# Altium PCB PC110-itx.PcbDoc (part 2 of 16)
Units mm, origin at the board's own origin, x right, y up, seen from the top; angles counter-clockwise.
Board outline 170 x 170 mm, 16 copper layers (FC1, FC2, FC3, FC4, IP1, IC1, IC2, IP2, IP3, IC3, IC4, IP4, BC4, BC3, BC2, BC1), stack 3.903 mm thick; 935 components, 1357 nets, 4698 pads, 3240 vias.
Unrouted connection lines stored in the file: 552.
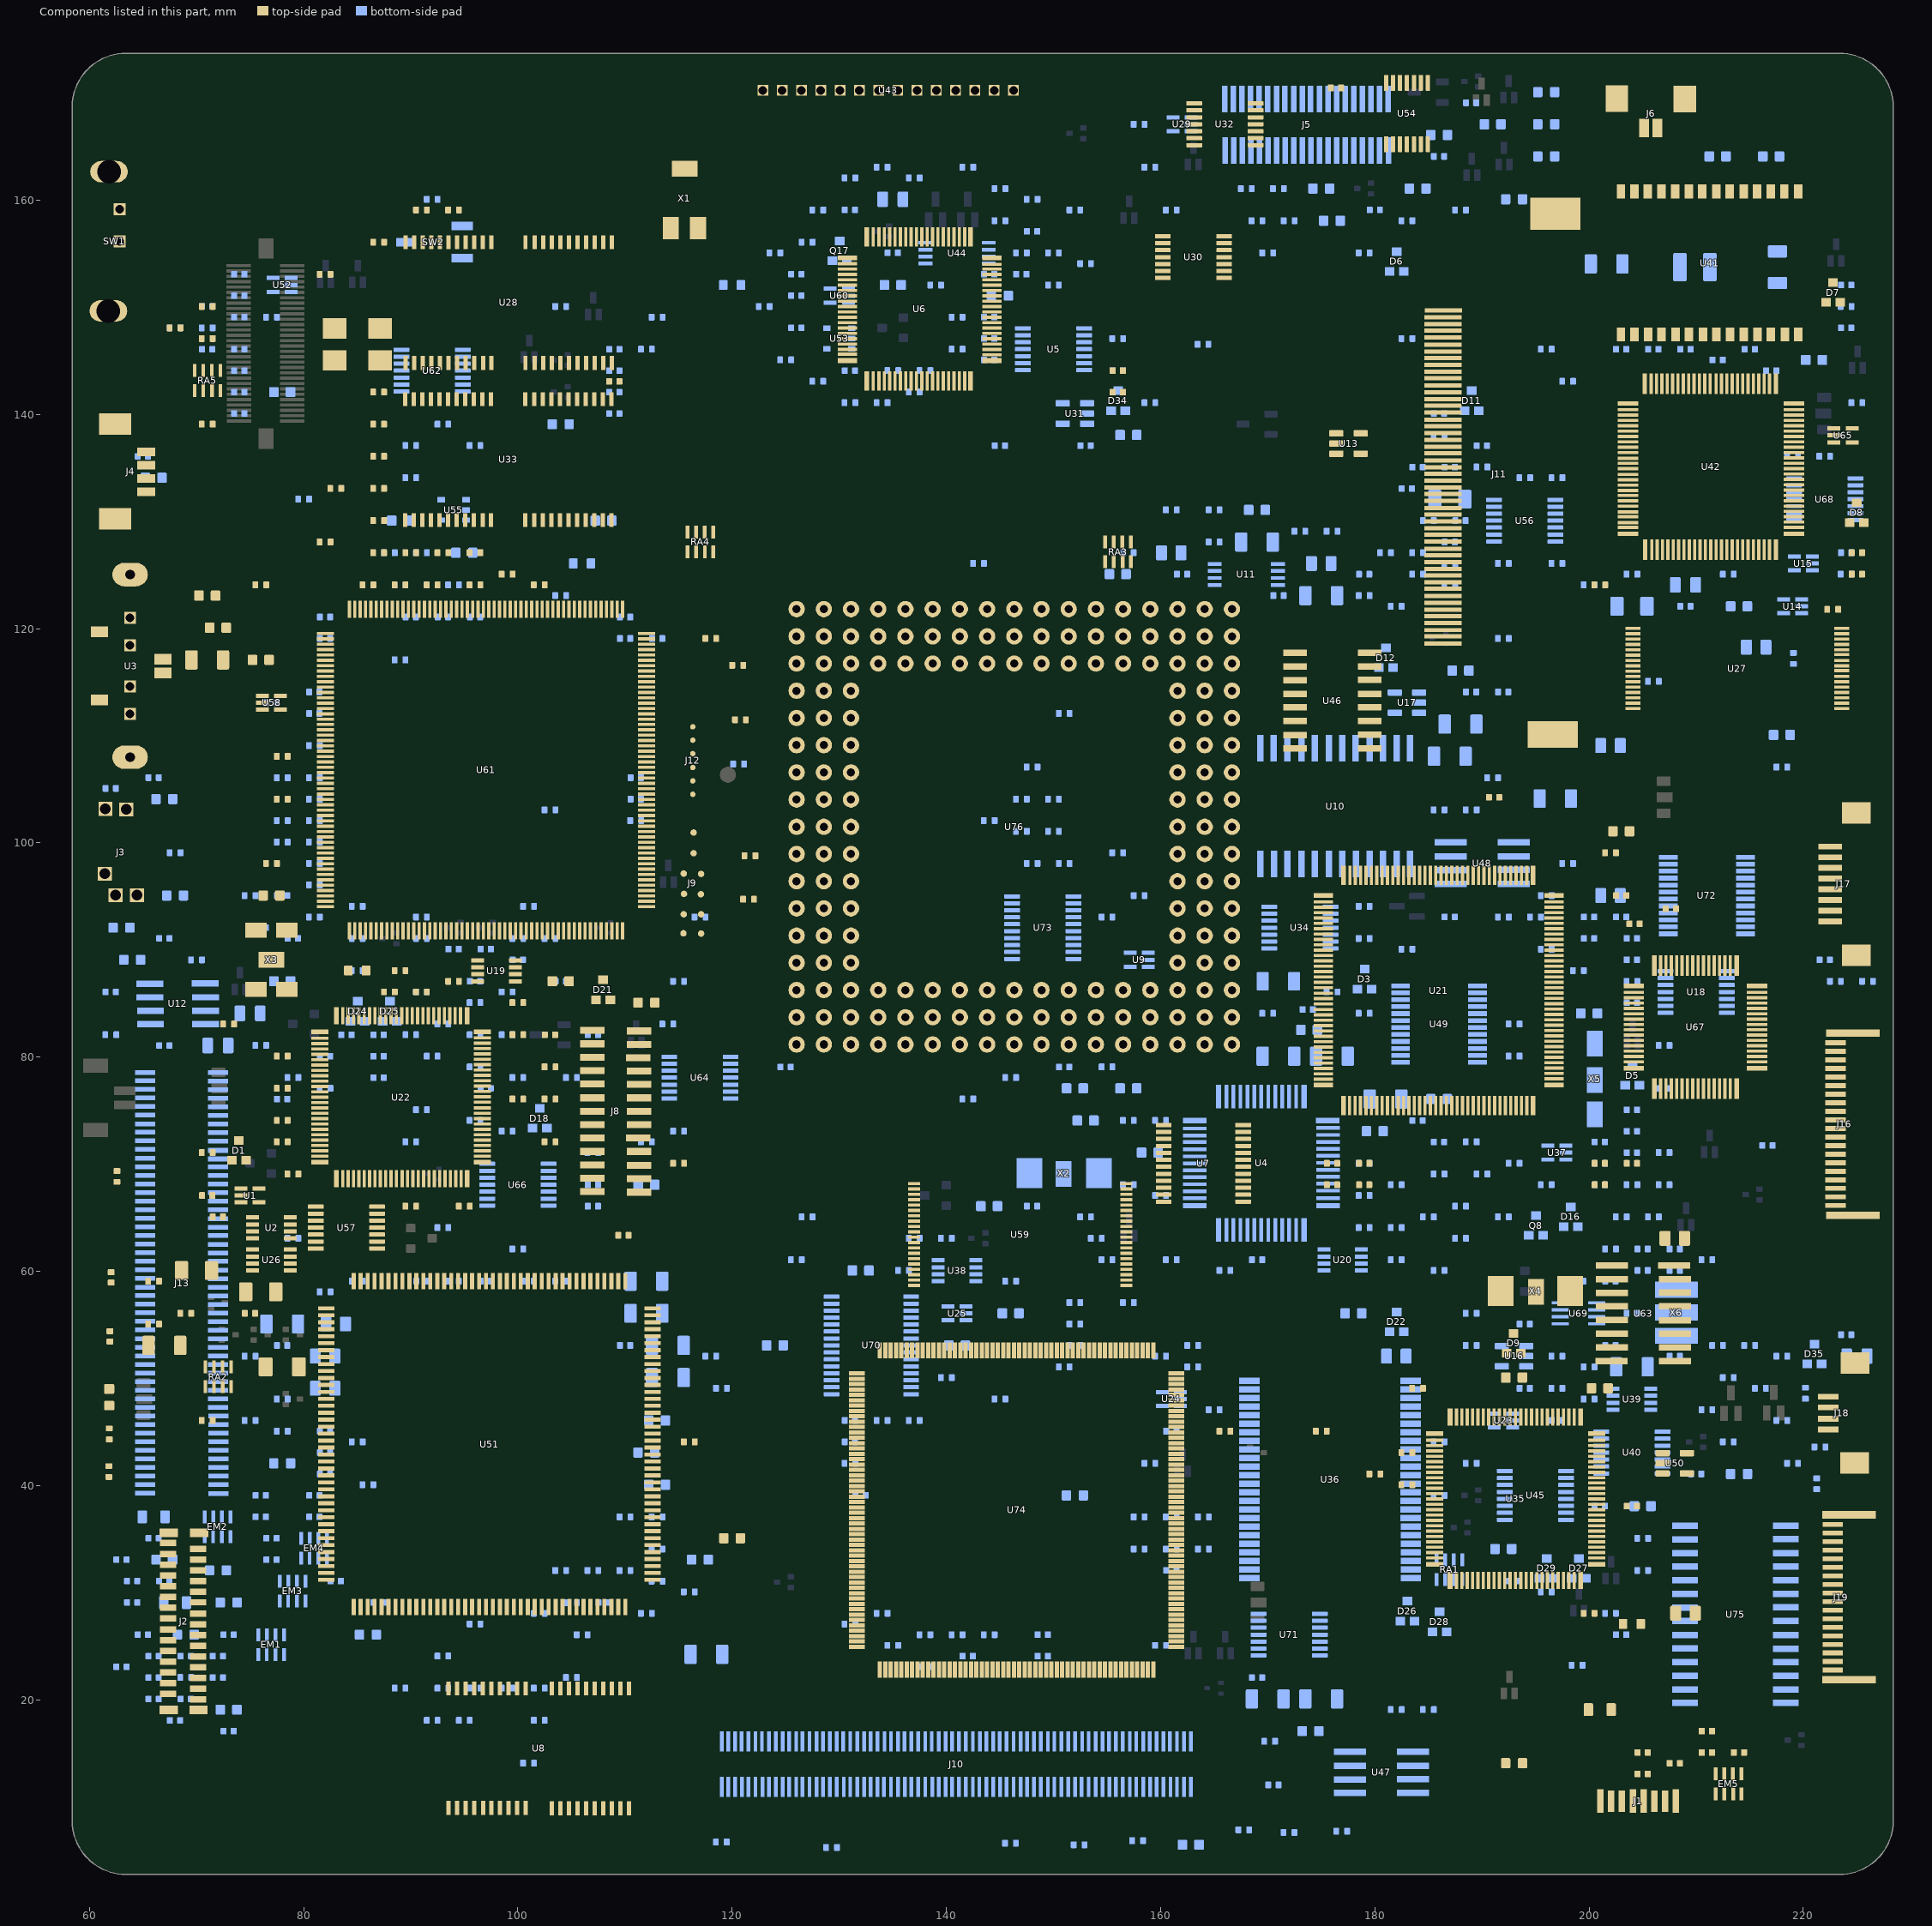
[diagram p16: the components of this part, seen from the top]

## Components (designator, comment, footprint, x,y, rotation, side; value= is the part's Value field where it differs from the comment) (continued)
R217 "Comment" R_0402_1005Metric#1 76,81.09 r0 bottom value=470k
R218 "Comment" R_0402_1005Metric#1 176.911,7.747 r0 bottom value=470k
R219 "Comment" R_0402_1005Metric#1 193,80.09 r0 bottom value=100k
R220 "Comment" R_0402_1005Metric#1 143,126.09 r0 bottom value=10k
R221 "Comment" R_0402_1005Metric#1 142,76.09 r0 bottom value=0
R222 "Comment" R_0402_1005Metric#1 152.398,6.477 r0 bottom value=6.8k
R223 "Comment" R_0402_1005Metric#1 176,86.09 r0 bottom value=100k
R224 "Comment" R_0402_1005Metric#1 179,70.09 r0 bottom value=470k
R225 "Comment" R_0402_1005Metric#1 118.997,6.731 r0 bottom value=6.8k
R226 "Comment" R_1206_3216Metric 171,87.09 r0 bottom value=120
R227 "Comment" R_0402_1005Metric#1 171.984,7.627 r0 bottom value=10k
R228 "Comment" R_0402_1005Metric#2 183,40.09 r0 top value=470k
R229 "Comment" R_0402_1005Metric#1 197,49.09 r0 bottom value=470k
R230 "Comment" R_0805_2012Metric#2 209,28.09 r0 top value=0
R231 "Comment" R_0603_1608Metric#2 204,27.09 r0 top value=0
R232 "Comment" R_0402_1005Metric#1 183,158.09 r0 bottom value=10k
R233 "Comment" R_0402_1005Metric#1 89,21.09 r0 bottom value=470k
R234 "Comment" R_0402_1005Metric#1 69,22.09 r0 bottom value=100k
R235 "Comment" R_0402_1005Metric#1 169,158.09 r0 bottom value=470k
R236 "Comment" R_0402_1005Metric#1 104,32.09 r0 bottom value=470
R237 "Comment" R_0402_1005Metric#1 161,159.09 r0 bottom value=10k
R238 "Comment" R_0603_1608Metric#2 85,88.09 r0 top value=56
R239 "Comment" R_0603_1608Metric#1 120,152.09 r0 bottom value=56
R240 "Comment" R_0402_1005Metric#1 113,149.09 r0 bottom value=47k
R241 "Comment" R_1206_3216Metric_Pad1.30x1.75mm_HandSolder 78,51.09 r0 top value=8.2
R242 "Comment" R_0402_1005Metric#2 166,45.09 r0 top value=7.5k
R243 "Comment" R_0402_1005Metric#1 191,106.09 r0 bottom value=470k
R244 "Comment" R_0402_1005Metric#1 189,103.09 r0 bottom value=470k
R245 "Comment" R_0402_1005Metric#1 186,103.09 r0 bottom value=470k
R246 "Comment" R_0402_1005Metric#1 103,91.09 r0 bottom value=47k
R247 "Comment" R_0402_1005Metric#1 120.609,107.362 r0 bottom value=470k
R248 "Comment" R_0402_1005Metric#1 91,93.09 r0 bottom value=470k
R249 "Comment" R_0402_1005Metric#1 100,91.09 r0 bottom value=47k
R250 "Comment" R_0805_2012Metric#1 175,126.09 r0 bottom value=0
R251 "Comment" R_0402_1005Metric#1 111,102.09 r0 bottom value=33
R252 "Comment" R_0402_1005Metric#2 120.777,111.506 r0 top value=33
R253 "Comment" R_0402_1005Metric#2 120.523,116.586 r0 top value=DNP
R254 "Comment" R_0402_1005Metric#1 170,84.09 r0 bottom value=47k
R255 "Comment" R_0402_1005Metric#1 100,62.09 r0 bottom value=33
R256 "Comment" R_0805_2012Metric#1 161,127.09 r0 bottom value=100
R257 "Comment" R_0402_1005Metric#1 127,65.09 r0 bottom value=33
R258 "Comment" R_0402_1005Metric#1 179,84.09 r0 bottom value=10k
R259 "Comment" R_0402_1005Metric#1 95,18.09 r0 bottom value=470k
R260 "Comment" R_0402_1005Metric#1 213,44.09 r0 bottom value=133k
R261 "Comment" R_0402_1005Metric#2 102,124.09 r0 top value=33
R262 "Comment" R_0402_1005Metric#1 145,48.09 r0 bottom value=470k
R263 "Comment" R_0402_1005Metric#1 85,59.09 r0 bottom value=4.7k
R264 "Comment" R_0805_2012Metric#1 83,55.09 r0 bottom value=150
R265 "Comment" R_0402_1005Metric#1 96,27.09 r0 bottom value=4.7k
R266 "Comment" R_0402_1005Metric#1 202,62.09 r0 bottom value=50k
R267 "Comment" R_0805_2012Metric#1 82,49.09 r0 bottom value=150
R268 "Comment" R_0402_1005Metric#1 161,131.09 r0 bottom value=100k
R269 "Comment" R_0402_1005Metric#1 96,21.09 r0 bottom value=470k
R270 "Comment" R_0402_1005Metric#1 102,21.09 r0 bottom value=4.7k
R271 "Comment" R_0402_1005Metric#1 219,42.09 r0 bottom value=DNP
R272 "Comment" R_0402_1005Metric#2 99,125.09 r0 top value=33
R273 "Comment" R_0805_2012Metric#1 82,52.09 r0 bottom value=150
R274 "Comment" R_0402_1005Metric#2 93,127.09 r0 top value=33
R275 "Comment" R_0402_1005Metric#1 211,61.09 r0 bottom value=4.7k
R276 "Comment" R_0402_1005Metric#1 186,60.09 r0 bottom value=33k
R277 "Comment" R_0402_1005Metric#1 82,77.09 r0 bottom value=200k
R278 "Comment" R_0402_1005Metric#1 134,141.09 r0 bottom value=470k
R279 "Comment" R_0402_1005Metric#1 99,21.09 r0 bottom value=4.7k
R280 "Comment" R_0402_1005Metric#1 79,78.09 r0 bottom value=47k
R281 "Comment" R_0402_1005Metric#1 96,137.09 r0 bottom value=10k
R282 "Comment" R_0402_1005Metric#1 171,161.09 r0 bottom value=470k
R283 "Comment" R_0402_1005Metric#1 128,143.09 r0 bottom value=4.7k
R284 "Comment" R_0805_2012Metric#2 208,63.09 r0 top value=10
R285 "Comment" R_0402_1005Metric#1 135,144.09 r0 bottom value=0
R286 "Comment" R_0402_1005Metric#1 188,159.09 r0 bottom value=22k
R287 "Comment" R_0402_1005Metric#1 77,149.09 r0 bottom value=470k
R288 "Comment" R_0402_1005Metric#1 131,141.09 r0 bottom value=47k
R289 "Comment" R_0402_1005Metric#2 175,45.09 r0 top value=10k
R290 "Comment" R_0402_1005Metric#1 192,126.09 r0 bottom value=DNP
R291 "Comment" R_0402_1005Metric#2 116,44.09 r0 top value=220
R292 "Comment" R_0805_2012Metric#1 202,95.09 r0 bottom value=DNP
R293 "Comment" R_0402_1005Metric#2 61.85,44.83 r90 top value=22k
R294 "Comment" R_0402_1005Metric#2 202,99.09 r0 top value=1.2k
R295 "Comment" R_0402_1005Metric#1 185,130.09 r0 bottom value=0
R296 "Comment" R_0402_1005Metric#1 197,134.09 r0 bottom value=DNP
R297 "Comment" R_0402_1005Metric#2 61.82,41.32 r90 top value=220
R298 "Comment" R_0402_1005Metric#1 197,126.09 r0 bottom value=DNP
R299 "Comment" R_0402_1005Metric#1 187,126.09 r0 bottom value=0
R300 "Comment" R_0805_2012Metric#1 215.6,118.28 r0 bottom value=0
R301 "Comment" R_0402_1005Metric#1 194,134.09 r0 bottom value=DNP
R302 "Comment" R_0402_1005Metric#2 79,69.09 r0 top value=470k
R303 "Comment" R_0402_1005Metric#2 88,86.09 r0 top value=470k
R304 "Comment" R_0402_1005Metric#1 196,30.09 r0 bottom value=4.7k
R305 "Comment" R_0402_1005Metric#2 89,88.09 r0 top value=470k
R306 "Comment" R_0402_1005Metric#2 90,66.09 r0 top value=470k
R307 "Comment" R_0402_1005Metric#2 78,72.09 r0 top value=470k
R308 "Comment" R_0402_1005Metric#1 123,150.09 r0 bottom value=10
R309 "Comment" R_0402_1005Metric#2 91,86.09 r0 top value=470k
R310 "Comment" R_0402_1005Metric#1 196,95.09 r0 bottom value=100k
R311 "Comment" R_0402_1005Metric#2 66,55.09 r0 top value=470k
R312 "Comment" R_0402_1005Metric#1 144,26.09 r0 bottom value=47k
R313 "Comment" R_0805_2012Metric#1 182,52.09 r0 bottom value=300
R314 "Comment" R_0402_1005Metric#1 189,72.09 r0 bottom value=470k
R315 "Comment" R_0402_1005Metric#1 90,82.09 r0 bottom value=470k
R316 "Comment" R_0402_1005Metric#1 81,109.09 r0 bottom value=1k
R317 "Comment" R_0402_1005Metric#1 90,72.09 r0 bottom value=33
R318 "Comment" R_0402_1005Metric#2 95,66.09 r0 top value=33
R319 "Comment" R_0402_1005Metric#1 78,106.09 r0 bottom value=1k
R320 "Comment" R_0402_1005Metric#1 104,123.09 r0 bottom value=10k
R321 "Comment" R_0402_1005Metric#1 112,146.09 r0 bottom value=100k
R322 "Comment" R_0402_1005Metric#2 121.664,98.806 r0 top value=33
R323 "Comment" R_0402_1005Metric#2 78,108.09 r0 top value=1k
R324 "Comment" R_0402_1005Metric#1 93,64.09 r0 bottom value=33
R325 "Comment" R_0402_1005Metric#1 137,63.09 r0 bottom value=10k
R326 "Comment" R_0402_1005Metric#2 78,104.09 r0 top value=33
R327 "Comment" R_0402_1005Metric#1 157,74.09 r0 bottom value=470k
R328 "Comment" R_0402_1005Metric#1 150,101.09 r0 bottom value=4.7k
R329 "Comment" R_0402_1005Metric#1 94,124.09 r0 bottom value=33
R330 "Comment" R_0402_1005Metric#1 148,98.09 r0 bottom value=4.7k
R331 "Comment" R_0402_1005Metric#1 148,107.09 r0 bottom value=4.7k
R332 "Comment" R_0402_1005Metric#1 85,88.09 r0 bottom value=33
R333 "Comment" R_0402_1005Metric#1 88,127.09 r0 bottom value=33
R334 "Comment" R_0402_1005Metric#2 87,127.09 r0 top value=33
R335 "Comment" R_0402_1005Metric#2 87,142.09 r0 top value=33
R336 "Comment" R_0402_1005Metric#1 147,104.09 r0 bottom value=4.7k
R337 "Comment" R_0402_1005Metric#2 89,124.09 r0 top value=33
R338 "Comment" R_0402_1005Metric#2 87,136.09 r0 top value=33
R339 "Comment" R_0402_1005Metric#1 151,98.09 r0 bottom value=4.7k
R340 "Comment" R_0402_1005Metric#1 101,94.09 r0 bottom value=33
R341 "Comment" R_0402_1005Metric#1 89,117.09 r0 bottom value=33
R342 "Comment" R_0402_1005Metric#1 90,134.09 r0 bottom value=33
R343 "Comment" R_0402_1005Metric#1 91,127.09 r0 bottom value=33
R344 "Comment" R_0402_1005Metric#1 196,68.09 r0 bottom value=DNP
R345 "Comment" R_0402_1005Metric#1 93,139.09 r0 bottom value=33
R346 "Comment" R_0402_1005Metric#1 90,137.09 r0 bottom value=33
R347 "Comment" R_0402_1005Metric#2 86,124.09 r0 top value=33
R348 "Comment" R_0402_1005Metric#1 118,52.09 r0 bottom value=33
R349 "Comment" R_0402_1005Metric#1 183,90.09 r0 bottom value=100k
R350 "Comment" R_0402_1005Metric#1 103,103.09 r0 bottom value=33
R351 "Comment" R_0402_1005Metric#1 150,104.09 r0 bottom value=4.7k
R352 "Comment" R_0402_1005Metric#2 87,133.09 r0 top value=33
R353 "Comment" R_0402_1005Metric#1 206,115.09 r0 bottom value=56
R354 "Comment" R_0402_1005Metric#1 147,101.09 r0 bottom value=4.7k
R355 "Comment" R_0402_1005Metric#1 144,102.09 r0 bottom value=4.7k
R356 "Comment" R_0402_1005Metric#1 141,146.09 r0 bottom value=47k
R357 "Comment" R_0402_1005Metric#1 192,119.09 r0 bottom value=33
R358 "Comment" R_0402_1005Metric#1 105,78.09 r0 bottom value=47
R359 "Comment" R_0402_1005Metric#1 114,83.09 r0 bottom value=33
R360 "Comment" R_0402_1005Metric#1 184,127.09 r0 bottom value=470k
R361 "Comment" R_0402_1005Metric#1 184,125.09 r0 bottom value=470k
R362 "Comment" R_0402_1005Metric#1 224,150.09 r0 bottom value=2k
R363 "Comment" R_0402_1005Metric#1 140,50.09 r0 bottom value=100k
R364 "Comment" R_0402_1005Metric#1 199,88.09 r0 bottom value=DNP
R365 "Comment" R_0402_1005Metric#1 204,125.09 r0 bottom value=10k
R366 "Comment" R_0402_1005Metric#1 222,136.09 r0 bottom value=0
R367 "Comment" R_0402_1005Metric#1 219,136.09 r0 bottom value=0
R368 "Comment" R_0402_1005Metric#1 225,141.09 r0 bottom value=1.5k
R369 "Comment" R_0402_1005Metric#1 187,124.09 r0 bottom value=22k
R370 "Comment" R_0402_1005Metric#1 155,79.09 r0 bottom value=0
R371 "Comment" R_0402_1005Metric#1 213,125.09 r0 bottom value=2k
R372 "Comment" R_0402_1005Metric#1 192,93.09 r0 bottom value=100k
R373 "Comment" R_0402_1005Metric#1 81,104.09 r0 bottom value=4.7k
R374 "Comment" R_0402_1005Metric#1 81,100.09 r0 bottom value=4.7k
R375 "Comment" R_0402_1005Metric#1 81,106.09 r0 bottom value=4.7k
R376 "Comment" R_0402_1005Metric#1 78,102.09 r0 bottom value=4.7k
R377 "Comment" R_0402_1005Metric#1 81,96.09 r0 bottom value=4.7k
R378 "Comment" R_0402_1005Metric#1 78,100.09 r0 bottom value=4.7k
R379 "Comment" R_0402_1005Metric#1 161,34.09 r0 bottom value=470k
R380 "Comment" R_0402_1005Metric#1 81,98.09 r0 bottom value=4.7k
R381 "Comment" R_0402_1005Metric#1 81,102.09 r0 bottom value=4.7k
R382 "Comment" R_0402_1005Metric#1 115,73.09 r0 bottom value=50k
R383 "Comment" R_0402_1005Metric#1 112,72.09 r0 bottom value=33k
R384 "Comment" R_0402_1005Metric#1 152,53.09 r0 bottom value=10k
R385 "Comment" R_0402_1005Metric#1 137,162.09 r0 bottom value=47k
R386 "Comment" R_0402_1005Metric#1 196,146.09 r0 bottom value=1k
R387 "Comment" R_0402_1005Metric#1 152,57.09 r0 bottom value=DNP
R388 "Comment" R_0402_1005Metric#1 151,112.09 r0 bottom value=3K
R389 "Comment" R_0402_1005Metric#1 151,51.09 r0 bottom value=10k
R390 "Comment" R_0402_1005Metric#1 137,142.09 r0 bottom value=100k
R391 "Comment" R_0402_1005Metric#1 163,51.09 r0 bottom value=10k
R392 "Comment" R_0402_1005Metric#1 189,56.09 r0 bottom value=22k
R393 "Comment" R_0402_1005Metric#1 104,59.09 r0 bottom value=47k
R394 "Comment" R_0402_1005Metric#1 163,53.09 r0 bottom value=DNP
R395 "Comment" R_0402_1005Metric#2 118,119.09 r0 top value=10k
R396 "Comment" R_0402_1005Metric#1 160,52.09 r0 bottom value=10k
R397 "Comment" R_0402_1005Metric#1 170,155.09 r0 bottom value=47k
R398 "Comment" R_0402_1005Metric#1 119,49.09 r0 bottom value=22k
R399 "Comment" R_0402_1005Metric#1 160,25.09 r0 bottom value=22k
R400 "Comment" R_0402_1005Metric#2 91,159.09 r0 top value=DNP
R401 "Comment" R_0402_1005Metric#2 87,156.09 r0 top value=100k
R402 "Comment" R_0402_1005Metric#1 68,148.09 r0 bottom value=DNP
R403 "Comment" R_0402_1005Metric#1 92,160.09 r0 bottom value=DNP
R404 "Comment" R_0402_1005Metric#1 71,148.09 r0 bottom value=100k
R405 "Comment" R_0402_1005Metric#1 89,124.09 r0 bottom value=100k
R406 "Comment" R_0402_1005Metric#2 68,148.09 r0 top value=100k
R407 "Comment" R_0402_1005Metric#1 155,61.09 r0 bottom value=100k
R408 "Comment" R_0402_1005Metric#1 221.55,43.62 r0 bottom value=47k
R409 "Comment" R_0402_1005Metric#1 124,155.09 r0 bottom value=2.2k
R410 "Comment" R_0402_1005Metric#1 126,61.09 r0 bottom value=20k
R411 "Comment" R_0402_1005Metric#1 221.25,40.18 r90 bottom value=47k
R412 "Comment" R_0402_1005Metric#1 183,147.09 r0 bottom value=7.5k
R413 "Comment" R_0402_1005Metric#1 154,63.09 r0 bottom value=100k
RA1 "Comment" R-array#1 187,32.09 r0 bottom value=47k
RA2 "Comment" R-array#2 72,50.09 r0 top value=10k
RA3 "Comment" R-array#2 156,127.09 r0 top value=22k
RA4 "Comment" R-array#2 117.012,128.032 r0 top value=10k
RA5 "Comment" R-array#2 71,143.09 r0 top value=470k
SW1 "Comment" Switch 61.877,155.912 r0 top value=Switch
SW2 "Comment" LidSwitch 92,156.09 r0 bottom value=LidSwitch
U1 "Comment" SOT-353#1 75,67.09 r0 top value=EA
U2 "Comment" sso-8#1 77,64.09 r0 top value=7W32
U3 "Comment" IRDA 65.35,116.505 r90 top value="HSDL-1000 X03"
U4 "Comment" QFN-52 169,70.09 r0 bottom value=ES488F
U5 "Comment" TSSOP-14_4.4x5mm_P0.65mm#1 150,146.09 r0 bottom value=74HC14
U6 "Comment" QFN-80 137.71,149.825 r0 top value=M38223E4HP
U7 "Comment" TSSOP-24_6.1x7.8mm_P0.65mm 164,70.09 r0 top value=HD151015
U8 "Comment" GRAMchip 101.981,15.621 r0 top value=51W4260ATT7
U9 "Comment" SOT-353#2 158,89.09 r0 bottom value=E4
U10 "Comment" SOP-24 176,104.09 r0 bottom value=YM3812
U11 "Comment" soic-8-small 168,125.09 r0 bottom value=NJM2904M
U12 "Comment" SOIC-8-narrow 68,85.09 r0 bottom value=LM4861
U13 "Comment" SOT-23-5#1 177.546,137.287 r0 top value=8C01
U14 "Comment" SOT-353#2 219,122.09 r0 bottom value=EA
U15 "Comment" SOT-353#2 220,126.09 r0 bottom value=EA
U16 "Comment" SOT-23-5#2 193,52.09 r0 bottom value=8C01
U17 "Comment" SOT-23-5#2 183,113.09 r0 bottom value=3E00
U18 "Comment" TSSOP-14_4.4x5mm_P0.65mm#1 210,86.09 r0 bottom value=VT74
U19 "Comment" sso-8#1 98,88.09 r0 top value=7W126
U20 "Comment" sso-8#2 177,61.09 r0 bottom value=7W14
U21 "Comment" Bowman 186.182,86.741 r0 top value=Bowman
U22 "Comment" FDC 88.65,76.56 r90 top value=FDC37C665IR
U23 "Comment" SOT-353#2 192,46.09 r0 bottom value=EA
U24 "Comment" SOT-353#2 161,48.09 r0 bottom value=E4
U25 "Comment" SOT-353#2 141,56.09 r0 bottom value=E4
U26 "Comment" sso-8#1 77,61.09 r0 top value=7W126
U27 "Comment" Flash-32 214.08,115.89 r0 top value=AT29LV512-12TU
U28 "Comment" RAMchip 99.533,150.607 r0 top value=M5M4V16160BTP
U29 "Comment" SOT-353#2 162,167.09 r0 bottom value=E2
U30 "Comment" TSSOP-14_4.4x5mm_P0.65mm#2 163.068,154.686 r0 top value=74LVT74
U31 "Comment" SOT-23-5#2 152,140.09 r0 bottom value=3F01
U32 "Comment" TSSOP-14_4.4x5mm_P0.65mm#2 166,167.09 r0 top value=V74
U33 "Comment" RAMchip 99.513,135.948 r0 top value=M5M4V16160BTP
U34 "Comment" TSSOP-14_4.4x5mm_P0.65mm#1 173,92.09 r0 bottom value=74LV126
U35 "Comment" Pluto 193.12,39.25 r0 top value=Pluto
U36 "Comment" SOP48 175.59,40.94 r0 bottom value=MSM538032E
U37 "Comment" SOT-353#2 197,71.09 r0 bottom value=E8
U38 "Comment" sso-8#2 141,60.09 r0 bottom value=7W14
U39 "Comment" sso-8#2 204,48.09 r0 bottom value=7W00
U40 "Comment" TSSOP-14_4.4x5mm_P0.65mm#1 204,43.09 r0 bottom value=SN74LS74a
U41 "Comment" SanDisk 211.875,154.45 r0 top value=SDLB-4
U42 "Comment" QFN-100 211.852,134.95 r0 top value=SC414281PU4
U43 "Comment" LCD 134.77,170.26 r0 top value="Front LCD"
U44 "Comment" soic-8-small 141,155.09 r0 bottom value=NJM2904M
U45 "Comment" TSSOP-16_4.4x5mm_P0.65mm 195,39.09 r0 bottom value=SN74LS123A
U46 "Comment" SOP-16 176.022,113.284 r180 top value=Y3014
U47 "Comment" SOIC-8 180.594,13.208 r0 bottom value=3414A
U48 "Comment" SOIC-8 190,98.09 r0 bottom value=DS1669
U49 "Comment" SSOP-24_5.3x8.2mm_P0.65mm 186,83.09 r0 bottom value=HD151015
U50 "Comment" SOT-23-5#1 208,42.09 r0 top value=3T01
U51 "Comment" EIAJ160 97.35,43.88 r270 top value=~
U52 "Comment" SOT-353#2 78,152.09 r0 bottom value=EA
U53 "Comment" TSOP-5_1.65x3.05mm_P0.95mm 130,147.09 r0 bottom value=3F01
U54 "Comment" TSSOP-14_4.4x5mm_P0.65mm#2 183,168.09 r270 top value=SN74HC74
U55 "Comment" TSOP-5_1.65x3.05mm_P0.95mm 94,131.09 r0 bottom value=3T01
U56 "Comment" TSSOP-14_4.4x5mm_P0.65mm#1 194,130.09 r0 bottom value=SN74LV32
U57 "Comment" TSSOP-14_4.4x5mm_P0.65mm#2 84,64.09 r0 top value=SN74LVT125
U58 "Comment" SOT-353#1 77,113.09 r0 top value=EA
U59 "Comment" Flash-40 147,64.09 r0 top value=28F002BX
U60 "Comment" SOT-353#2 130,151.09 r0 bottom value=E3
U61 "Comment" QFP208 97.028,106.807 r180 top value=~
U62 "Comment" TSSOP-14_4.4x5mm_P0.65mm#1 92,144.09 r0 bottom value=SN74LVT125
U63 "Comment" SOIC-16W 205,56.09 r0 top value=AV9154A-27
U64 "Comment" TSSOP-14_4.4x5mm_P0.65mm#1 117,78.09 r0 bottom value=SN74LV126
U65 "Comment" SOT-353#1 223.7,138.05 r0 top value=E4
U66 "Comment" TSSOP-14_4.4x5mm_P0.65mm#1 100,68.09 r0 bottom value=SN74LV02
U67 "Comment" QFN64 210.185,83.058 r180 top value=M38813M4
U68 "Comment" TSSOP-14_4.4x5mm_P0.65mm#1 222,132.09 r0 bottom value=SN74LV08
U69 "Comment" SSOP-8_2.95x2.8mm_P0.65mm 199,56.09 r0 bottom value=SN74LVC2G32
U70 "Comment" TSSOP-30_6.1x9.7mm_P0.65mm 133,53.09 r0 bottom value=TPS2201
U71 "Comment" TSSOP-14_4.4x5mm_P0.65mm#1 172,26.09 r0 bottom value=SN74LV32
U72 "Comment" SSOP-24_5.3x8.2mm_P0.65mm 211,95.09 r0 bottom value=HD151015
U73 "Comment" TSSOP-20_4.4x6.5mm_P0.65mm 149,92.09 r0 bottom value=SN74LVT244B
U74 "Comment" LQFP208 146.558,37.719 r270 top value=~
U75 "Comment" SSOP-28 214.205,27.56 r90 bottom value=D17137AGT
U76 "Comment" PGA168 123.482,124.367 r0 top value=~
X1 "Comment" XTAL-2 115.52,162.941 r0 top value=245759
X2 "Comment" XTAL-1 151,69.09 r0 bottom value=89G6821
X3 "Comment" XTAL-3 77,89.09 r0 top value=32768
X4 "Comment" XTAL-6 195,58.09 r0 top value=59G3482
X5 "Comment" XTAL-5 200.533,77.851 r0 bottom value=4.00
X6 "Comment" XTAL-4 208,56.09 r0 bottom value=8.00

## Footprints (in the part's own frame and the unit in brackets; to place one, negate y for a bottom-side part, rotate by r counter-clockwise, add the part's x,y. Pads: shape width x height; smd on the part's side, far side on the other; paste and mask are expansions set on the pad)
3D#1 [mm]
  rect 0.9x0.8 smd paste-0.9 mask+0: 1(0.625,-0.725) 2(-0.05,1.125) 3(-0.7,-0.725)
3D#2 [mm]
  rect 0.9x0.8 smd paste-0.9 mask+0: 1(-0.625,0.725) 2(0.05,-1.125) 3(0.7,0.725)
Audio-Jack [mm]
  rect 1.3x1.3 hole 1 paste-2539.97 mask+0: 1(3.95,2.95) 2(3.9,1) 3(-2.1,3) 4(-4.1,2) 5(-4.1,0)
  Edge.Cuts circle w0.254: c1.9,-2.05 r0.791
  Edge.Cuts circle w0.254: c-2.1,0.95 r0.791
  Edge.Cuts circle w0.254: c1.9,1.95 r0.791
  Edge.Cuts circle w0: c1.9,1.95 r0.791
Bowman [mm]
  rect 1.8x0.45 smd paste-1.8 mask+0: 1(-10.973,8.35) 36(-11,-9.35) 73(10.55,-9.35) 108(10.55,8.35)
  rect 1.8x0.3 smd paste-1.8 mask+0: 2(-10.973,7.75) 3(-10.973,7.25) 4(-10.973,6.757) 5(-10.973,6.25) 6(-10.973,5.75) 7(-10.973,5.25) 8(-10.973,4.75) 9(-10.973,4.25) 10(-10.973,3.75) 11(-10.973,3.252) 12(-10.973,2.75) 13(-10.973,2.25) 14(-10.973,1.75) 15(-10.973,1.25) 16(-10.973,0.75) 17(-10.973,0.25) 18(-10.973,-0.253) 19(-10.973,-0.761) 20(-10.973,-1.269) 21(-10.973,-1.777) 22(-10.973,-2.285) 23(-11,-2.793) 24(-11,-3.3) 25(-11,-3.8) 26(-11,-4.3) 27(-11,-4.8) 28(-11,-5.3) 29(-11,-5.8) 30(-11,-6.3) 31(-11,-6.8) 32(-11,-7.3) 33(-11,-7.8) 34(-11,-8.3) 35(-11,-8.8) 74(10.55,-8.75) 75(10.55,-8.25) 76(10.55,-7.75) 77(10.55,-7.25) 78(10.55,-6.75) 79(10.55,-6.25) 80(10.55,-5.75) 81(10.55,-5.25) 82(10.55,-4.75) 83(10.55,-4.25) 84(10.55,-3.75) 85(10.55,-3.25) 86(10.55,-2.75) 87(10.55,-2.25) 88(10.55,-1.75) 89(10.55,-1.25) 90(10.55,-0.75) 91(10.55,-0.25) 92(10.55,0.25) 93(10.55,0.75) 94(10.55,1.25) 95(10.55,1.75) 96(10.55,2.25) 97(10.55,2.75) 98(10.55,3.25) 99(10.55,3.75) 100(10.55,4.25) 101(10.55,4.75) 102(10.55,5.25) 103(10.55,5.75) 104(10.55,6.25) 105(10.55,6.75) 106(10.55,7.25) 107(10.55,7.75)
  rect 0.45x1.8 smd paste-1.8 mask+0: 37(-9.1,-11.25) 72(8.6,-11.25) 109(8.6,10.225) 144(-9.1,10.225)
  rect 0.3x1.8 smd paste-1.8 mask+0: 38(-8.534,-11.25) 39(-8.026,-11.25) 40(-7.518,-11.25) 41(-7.01,-11.25) 42(-6.502,-11.25) 43(-5.994,-11.25) 44(-5.5,-11.25) 45(-5,-11.25) 46(-4.5,-11.25) 47(-4,-11.25) 48(-3.5,-11.25) 49(-3,-11.25) 50(-2.5,-11.25) 51(-2,-11.25) 52(-1.5,-11.25) 53(-1,-11.25) 54(-0.5,-11.25) 55(0,-11.25) 56(0.5,-11.25) 57(1,-11.25) 58(1.5,-11.25) 59(2,-11.25) 60(2.5,-11.25) 61(3,-11.25) 62(3.5,-11.25) 63(4,-11.25) 64(4.5,-11.25) 65(5,-11.25) 66(5.5,-11.25) 67(6,-11.25) 68(6.5,-11.25) 69(7,-11.25) 70(7.5,-11.25) 71(8,-11.25) 110(8,10.225) 111(7.5,10.225) 112(7,10.225) 113(6.5,10.225) 114(6,10.225) 115(5.5,10.225) 116(5,10.225) 117(4.5,10.225) 118(4,10.225) 119(3.5,10.225) 120(3,10.225) 121(2.5,10.225) 122(2,10.225) 123(1.5,10.225) 124(1,10.225) 125(0.5,10.225) 126(0,10.225) 127(-0.5,10.225) 128(-1,10.225) 129(-1.5,10.225) 130(-2,10.225) 131(-2.5,10.225) 132(-3,10.225) 133(-3.5,10.225) 134(-4,10.225) 135(-4.5,10.225) 136(-5,10.225) 137(-5.5,10.225) 138(-6,10.225) 139(-6.5,10.225) 140(-7,10.225) 141(-7.5,10.225) 142(-8,10.225) 143(-8.5,10.225)
  silkscreen extent -9.22,7.78 -8.38,8.62
BridgeBatt [mm]
  rect 0.9x1.7 smd paste-1.7 mask+0: 1(0.65,-1.2) 2(-0.6,-1.2)
  rect 2.1x2.5 smd paste-2.5 mask+0: 3(3.2,1.5) 4(-3.15,1.55)
C_0402_1005Metric#1 [mm]
  rrect25% 0.56x0.62 smd paste-0.62 mask+0: 1(-0.48,0) 2(0.48,0)
  silkscreen extent -0.11,-0.36 0.11,0.36
C_0402_1005Metric#2 [mm]
  rrect25% 0.56x0.62 smd paste-0.62 mask+0: 1(0.48,0) 2(-0.48,0)
  silkscreen extent -0.11,-0.36 0.11,0.36
C_0603_1608Metric#1 [mm]
  rrect25% 0.9x0.95 smd paste-0.95 mask+0: 1(0.775,0) 2(-0.775,0)
  silkscreen extent -0.14,-0.51 0.14,0.51
C_0603_1608Metric#2 [mm]
  rrect25% 0.9x0.95 smd paste-0.95 mask+0: 1(-0.775,0) 2(0.775,0)
  silkscreen extent -0.14,-0.51 0.14,0.51
C_0805_2012Metric [mm]
  rrect25% 1x1.45 smd paste-1.45 mask+0: 1(0.95,0) 2(-0.95,0)
  silkscreen extent -0.26,-0.73 0.26,0.74
C_1206_3216Metric#1 [mm]
  rrect22% 1.15x1.8 smd paste-1.8 mask+0: 1(1.475,0) 2(-1.475,0)
  silkscreen extent -0.71,-0.91 0.71,0.91
C_1206_3216Metric#2 [mm]
  rrect22% 1.15x1.8 smd paste-1.8 mask+0: 1(-1.475,0) 2(1.475,0)
  silkscreen extent -0.71,-0.91 0.71,0.91
CF-card [mm]
  rect 0.4x3.5 smd paste-3.5 mask+0: 1(16.65,-5.2) 2(16,-5.2) 3(15.4,-5.2) 4(14.75,-5.2) 5(14.1,-5.2) 6(13.5,-5.2) 7(12.85,-5.2) 8(12.2,-5.2) 9(11.55,-5.2) 10(10.95,-5.2) 11(10.3,-5.2) 12(9.7,-5.2) 13(9.05,-5.2) 14(8.4,-5.2) 15(7.8,-5.2) 16(7.15,-5.2) 17(6.5,-5.2) 18(5.9,-5.2) 19(5.25,-5.2) 20(4.6,-5.2) 21(4,-5.2) 22(3.35,-5.2) 23(2.7,-5.2) 24(2.1,-5.2) 25(1.45,-5.2) 26(0.8,-5.2) 27(0.2,-5.2) 28(-0.45,-5.2) 29(-1.1,-5.2) 30(-1.7,-5.2) 31(-2.35,-5.2) 32(-3,-5.2) 33(-3.65,-5.2) 34(-4.25,-5.2) 35(-4.9,-5.2) 36(-5.55,-5.2) 37(-6.15,-5.2) 38(-6.8,-5.2) 39(-7.45,-5.2) 40(-8.1,-5.2) 41(-8.7,-5.2) 42(-9.35,-5.2) 43(-10,-5.2) 44(-10.6,-5.2) 45(-11.25,-5.2) 46(-11.9,-5.2) 47(-12.55,-5.2) 48(-13.15,-5.2) 49(-13.8,-5.2) 50(-14.45,-5.15)
  rect 3x4.7 smd paste-4.7 mask+0: 51(-23.45,5.3)
  rect 2.5x4.7 smd paste-4.7 mask+0: 52(25.15,5.05)
  silkscreen extent 17.49,-7.96 18.21,-7.24
connector-4 [mm]
  rect 0.8x1.7 smd paste-1.7 mask+0: 1(-1.9,-1.7) 2(-0.65,-1.7) 3(0.6,-1.7) 4(1.85,-1.7)
  rect 2x3 smd paste-3 mask+0: 5(-4.4,1.2) 6(4.45,1.2)
D_0603_1608Metric#1 [mm]
  rrect25% 0.875x0.95 smd paste-0.95 mask+0: 1(-0.788,0) 2(0.787,0)
  silkscreen extent -1.49,-0.73 0.8,0.74
D_0603_1608Metric#2 [mm]
  rrect25% 0.875x0.95 smd paste-0.95 mask+0: 1(0.788,0) 2(-0.787,0)
  silkscreen extent -0.8,-0.73 1.49,0.74
Debug-6 [mm]
  round 0.5 smd paste-0.5 mask+0: 1(-0.05,3.15) 2(-0.05,1.9) 3(-0.05,0.65) 4(-0.05,-0.65) 5(-0.05,-1.9) 6(-0.05,-3.15)
Debug-10 [mm]
  round 0.6 smd paste-0.6 mask+0: 1(0.075,4.825) 2(0.075,2.9) 3(0.775,0.975) 4(-0.85,1) 5(0.75,-0.925) 6(-0.825,-0.9) 7(0.775,-2.8) 8(-0.85,-2.8) 9(0.775,-4.6) 10(-0.875,-4.575)
Diode [mm]
  rect 2.2x1.9 smd paste-2.2 mask+0: 1(-2.1,-0.05) 2(2.15,-0.05)
  silkscreen extent -0.75,-0.85 -0.75,0.85
"Docking Port" [mm]
  rect 0.45x1.9 smd paste-1.9 mask+0: 1(19.2,-3.25) 2(18.35,-3.25) 3(17.55,-3.25) 4(16.75,-3.25) 5(15.95,-3.25) 6(15.15,-3.25) 7(14.35,-3.25) 8(13.55,-3.25) 9(12.75,-3.25) 10(11.95,-3.25) 11(11.15,-3.2) 12(10.35,-3.2) 13(9.55,-3.2) 14(8.75,-3.2) 15(7.95,-3.2) 16(7.15,-3.2) 17(6.35,-3.2) 18(5.55,-3.2) 19(4.75,-3.2) 20(3.95,-3.2) 21(3.15,-3.2) 22(2.35,-3.2) 23(1.55,-3.2) 24(0.75,-3.2) 25(-0.05,-3.2) 26(-0.85,-3.2) 27(-1.65,-3.2) 28(-2.5,-3.2) 29(-3.25,-3.2) 30(-4.05,-3.2) 31(-4.9,-3.2) 32(-5.65,-3.2) 33(-6.45,-3.2) 34(-7.3,-3.2) 35(-8.1,-3.2) 36(-8.9,-3.2) 37(-9.7,-3.2) 38(-10.5,-3.2) 39(-11.3,-3.2) 40(-12.05,-3.2) 41(-12.85,-3.2) 42(-13.7,-3.2) 43(-14.5,-3.2) 44(-15.3,-3.2) 45(-16.1,-3.2) 46(-16.9,-3.2) 47(-17.7,-3.2) 48(-18.5,-3.2) 49(-19.3,-3.2) 50(-20.1,-3.2) 51(-20.1,3.6) 52(-19.35,3.6) 53(-18.55,3.6) 54(-17.75,3.6) 55(-16.95,3.6) 56(-16.15,3.6) 57(-15.3,3.6) 58(-14.55,3.6) 59(-13.75,3.6) 60(-12.95,3.6) 61(-12.1,3.6) 62(-11.3,3.6) 63(-10.5,3.6) 64(-9.7,3.6) 65(-8.9,3.6) 66(-8.1,3.6) 67(-7.3,3.6) 68(-6.5,3.6) 69(-5.7,3.6) 70(-4.9,3.6) 71(-4.1,3.6) 72(-3.3,3.6) 73(-2.5,3.6) 74(-1.7,3.6) 75(-0.9,3.6) 76(-0.05,3.6) 77(0.7,3.6) 78(1.5,3.6) 79(2.3,3.6) 80(3.1,3.6) 81(3.9,3.6) 82(4.75,3.6) 83(5.55,3.6) 84(6.35,3.6) 85(7.15,3.6) 86(7.95,3.6) 87(8.75,3.6) 88(9.55,3.6) 89(10.35,3.6) 90(11.15,3.6) 91(11.95,3.6) 92(12.75,3.6) 93(13.55,3.6) 94(14.35,3.6) 95(15.15,3.6) 96(15.95,3.6) 97(16.75,3.6) 98(17.55,3.6) 99(18.35,3.6) 100(19.15,3.6)
EIAJ160 [mm]
  rect 1.53x0.38 smd paste-1.53 mask+0: 1(-15.22,12.675) 2(-15.22,12.025) 3(-15.22,11.375) 4(-15.22,10.725) 5(-15.22,10.075) 6(-15.22,9.425) 7(-15.22,8.775) 8(-15.22,8.125) 9(-15.22,7.475) 10(-15.22,6.825) 11(-15.22,6.175) 12(-15.22,5.525) 13(-15.22,4.875) 14(-15.22,4.225) 15(-15.22,3.575) 16(-15.22,2.925) 17(-15.22,2.275) 18(-15.22,1.625) 19(-15.22,0.975) 20(-15.22,0.325) 21(-15.22,-0.325) 22(-15.22,-0.975) 23(-15.22,-1.625) 24(-15.22,-2.275) 25(-15.22,-2.925) 26(-15.22,-3.575) 27(-15.22,-4.225) 28(-15.22,-4.875) 29(-15.22,-5.525) 30(-15.22,-6.175) 31(-15.22,-6.825) 32(-15.22,-7.475) 33(-15.22,-8.125) 34(-15.22,-8.775) 35(-15.22,-9.425) 36(-15.22,-10.075) 37(-15.22,-10.725) 38(-15.22,-11.375) 39(-15.22,-12.025) 40(-15.22,-12.675) 81(15.22,-12.675) 82(15.22,-12.025) 83(15.22,-11.375) 84(15.22,-10.725) 85(15.22,-10.075) 86(15.22,-9.425) 87(15.22,-8.775) 88(15.22,-8.125) 89(15.22,-7.475) 90(15.22,-6.825) 91(15.22,-6.175) 92(15.22,-5.525) 93(15.22,-4.875) 94(15.22,-4.225) 95(15.22,-3.575) 96(15.22,-2.925) 97(15.22,-2.275) 98(15.22,-1.625) 99(15.22,-0.975) 100(15.22,-0.325) 101(15.22,0.325) 102(15.22,0.975) 103(15.22,1.625) 104(15.22,2.275) 105(15.22,2.925) 106(15.22,3.575) 107(15.22,4.225) 108(15.22,4.875) 109(15.22,5.525) 110(15.22,6.175) 111(15.22,6.825) 112(15.22,7.475) 113(15.22,8.125) 114(15.22,8.775) 115(15.22,9.425) 116(15.22,10.075) 117(15.22,10.725) 118(15.22,11.375) 119(15.22,12.025) 120(15.22,12.675)
  rect 0.38x1.53 smd paste-1.53 mask+0: 41(-12.675,-15.22) 42(-12.025,-15.22) 43(-11.375,-15.22) 44(-10.725,-15.22) 45(-10.075,-15.22) 46(-9.425,-15.22) 47(-8.775,-15.22) 48(-8.125,-15.22) 49(-7.475,-15.22) 50(-6.825,-15.22) 51(-6.175,-15.22) 52(-5.525,-15.22) 53(-4.875,-15.22) 54(-4.225,-15.22) 55(-3.575,-15.22) 56(-2.925,-15.22) 57(-2.275,-15.22) 58(-1.625,-15.22) 59(-0.975,-15.22) 60(-0.325,-15.22) 61(0.325,-15.22) 62(0.975,-15.22) 63(1.625,-15.22) 64(2.275,-15.22) 65(2.925,-15.22) 66(3.575,-15.22) 67(4.225,-15.22) 68(4.875,-15.22) 69(5.525,-15.22) 70(6.175,-15.22) 71(6.825,-15.22) 72(7.475,-15.22) 73(8.125,-15.22) 74(8.775,-15.22) 75(9.425,-15.22) 76(10.075,-15.22) 77(10.725,-15.22) 78(11.375,-15.22) 79(12.025,-15.22) 80(12.675,-15.22) 121(12.675,15.22) 122(12.025,15.22) 123(11.375,15.22) 124(10.725,15.22) 125(10.075,15.22) 126(9.425,15.22) 127(8.775,15.22) 128(8.125,15.22) 129(7.475,15.22) 130(6.825,15.22) 131(6.175,15.22) 132(5.525,15.22) 133(4.875,15.22) 134(4.225,15.22) 135(3.575,15.22) 136(2.925,15.22) 137(2.275,15.22) 138(1.625,15.22) 139(0.975,15.22) 140(0.325,15.22) 141(-0.325,15.22) 142(-0.975,15.22) 143(-1.625,15.22) 144(-2.275,15.22) 145(-2.925,15.22) 146(-3.575,15.22) 147(-4.225,15.22) 148(-4.875,15.22) 149(-5.525,15.22) 150(-6.175,15.22) 151(-6.825,15.22) 152(-7.475,15.22) 153(-8.125,15.22) 154(-8.775,15.22) 155(-9.425,15.22) 156(-10.075,15.22) 157(-10.725,15.22) 158(-11.375,15.22) 159(-12.025,15.22) 160(-12.675,15.22)
  silkscreen extent -15.9,-14.12 14.12,14.12
FDC [mm]
  rect 0.45x1.6 smd paste-1.6 mask+0: 1(5.8,7.15) 25(-6.35,7.15) 51(-6.35,-8.05) 75(5.8,-8.05)
  rect 0.3x1.6 smd paste-1.6 mask+0: 2(5.2,7.15) 3(4.7,7.15) 4(4.2,7.15) 5(3.7,7.15) 6(3.2,7.15) 7(2.7,7.15) 8(2.2,7.15) 9(1.7,7.15) 10(1.2,7.15) 11(0.7,7.15) 12(0.2,7.15) 13(-0.3,7.15) 14(-0.8,7.15) 15(-1.3,7.15) 16(-1.8,7.15) 17(-2.3,7.15) 18(-2.8,7.15) 19(-3.3,7.15) 20(-3.8,7.15) 21(-4.3,7.15) 22(-4.8,7.15) 23(-5.3,7.15) 24(-5.8,7.15) 52(-5.8,-8.05) 53(-5.3,-8.05) 54(-4.8,-8.05) 55(-4.3,-8.05) 56(-3.8,-8.05) 57(-3.3,-8.05) 58(-2.8,-8.05) 59(-2.3,-8.05) 60(-1.8,-8.05) 61(-1.3,-8.05) 62(-0.75,-8.05) 63(-0.25,-8.05) 64(0.25,-8.05) 65(0.75,-8.05) 66(1.25,-8.05) 67(1.75,-8.05) 68(2.25,-8.05) 69(2.75,-8.05) 70(3.25,-8.05) 71(3.75,-8.05) 72(4.25,-8.05) 73(4.75,-8.05) 74(5.25,-8.05)
  rect 1.6x0.45 smd paste-1.6 mask+0: 26(-7.9,5.6) 50(-7.9,-6.6) 76(7.3,-6.6) 100(7.3,5.6)
  rect 1.6x0.3 smd paste-1.6 mask+0: 27(-7.9,5) 28(-7.9,4.5) 29(-7.9,4) 30(-7.9,3.5) 31(-7.9,3) 32(-7.9,2.5) 33(-7.9,2) 34(-7.9,1.5) 35(-7.9,1) 36(-7.9,0.5) 37(-7.9,0) 38(-7.9,-0.55) 39(-7.9,-1.05) 40(-7.9,-1.55) 41(-7.9,-2.05) 42(-7.9,-2.55) 43(-7.9,-3.05) 44(-7.9,-3.55) 45(-7.9,-4.05) 46(-7.9,-4.55) 47(-7.9,-5.05) 48(-7.9,-5.55) 49(-7.9,-6.05) 77(7.3,-6) 78(7.3,-5.5) 79(7.3,-5) 80(7.3,-4.5) 81(7.3,-4) 82(7.3,-3.5) 83(7.3,-3) 84(7.3,-2.5) 85(7.3,-2) 86(7.3,-1.5) 87(7.3,-1) 88(7.3,-0.5) 89(7.3,0) 90(7.3,0.5) 91(7.3,1) 92(7.3,1.5) 93(7.3,2) 94(7.3,2.5) 95(7.3,3) 96(7.3,3.5) 97(7.3,4) 98(7.3,4.5) 99(7.3,5)
  silkscreen extent 5.06,4.86 6.04,5.84
Flash-32 [mm]
  rect 1.4x0.3 smd paste-1.4 mask+0: 1(-10,4.15) 2(-10,3.65) 3(-10,3.15) 4(-10,2.65) 5(-10,2.15) 6(-10,1.65) 7(-10,1.15) 8(-10,0.65) 9(-10,0.15) 10(-10,-0.35) 11(-10,-0.85) 12(-10,-1.35) 13(-10,-1.85) 14(-10,-2.35) 15(-10,-2.85) 16(-10,-3.35) 17(9.5,-3.35) 18(9.5,-2.85) 19(9.5,-2.35) 20(9.5,-1.85) 21(9.5,-1.35) 22(9.5,-0.85) 23(9.5,-0.35) 24(9.5,0.2) 25(9.5,0.65) 26(9.5,1.15) 27(9.5,1.7) 28(9.5,2.15) 29(9.5,2.65) 30(9.5,3.15) 31(9.5,3.65) 32(9.5,4.15)
  silkscreen extent -8.84,3.36 -8.26,3.94
Flash-40 [mm]
  rect 1.1x0.3 smd paste-1.1 mask+0: 1(9.8,-5.4) 2(9.8,-4.9) 3(9.8,-4.4) 4(9.8,-3.9) 5(9.8,-3.4) 6(9.8,-2.9) 7(9.8,-2.4) 8(9.8,-1.9) 9(9.8,-1.4) 10(9.8,-0.9) 11(9.8,-0.4) 12(9.8,0.1) 13(9.8,0.6) 14(9.8,1.1) 15(9.8,1.6) 16(9.8,2.1) 17(9.8,2.6) 18(9.8,3.1) 19(9.8,3.6) 20(9.8,4.1) 21(-10,4.1) 22(-10,3.6) 23(-10,3.1) 24(-10,2.6) 25(-10,2.1) 26(-10,1.6) 27(-10,1.1) 28(-10,0.6) 29(-10,0.1) 30(-10,-0.4) 31(-10,-0.9) 32(-10,-1.4) 33(-10,-1.9) 34(-10,-2.4) 35(-10,-2.9) 36(-10,-3.4) 37(-10,-3.9) 38(-10,-4.4) 39(-10,-4.9) 40(-10,-5.4)
  silkscreen extent 8.22,-5.53 8.78,-4.97
Flat-4 [mm]
  rect 0.55x1.9 smd paste-1.9 mask+0: 1(-1.55,2.75) 2(-0.55,2.75) 3(0.5,2.75) 4(1.5,2.75)
  rect 2x2.7 smd paste-2.7 mask+0: 5(4.65,0.25) 6(-4.7,0.3)
Flat-8 [mm]
  rect 0.55x2.2 smd paste-2.2 mask+0: 1(-3.6,1.7) 2(-2.6,1.7) 3(-1.6,1.7) 4(-0.6,1.7) 5(0.4,1.7) 6(1.4,1.7) 7(2.4,1.7) 8(3.4,1.7)
  rect 2x2.7 smd paste-2.7 mask+0: 9(6.55,-0.75) 10(-6.75,-0.75)
Flat-18 [mm]
  rect 0.45x1.9 smd paste-1.9 mask+0: 1(-7,1.6) 2(-6.2,1.6) 3(-5.4,1.6) 4(-4.6,1.6) 5(-3.8,1.6) 6(-3,1.6) 7(-2.2,1.6) 8(-1.4,1.6) 9(-0.6,1.6) 10(0.2,1.6) 11(1,1.6) 12(1.8,1.6) 13(2.6,1.6) 14(3.4,1.6) 15(4.2,1.6) 16(5,1.6) 17(5.8,1.6) 18(6.6,1.6)
  rect 0.7x5 smd paste-5 mask+0: 19(7.5,0.1) 20(-7.9,0.1)
Flat-20 [mm]
  rect 0.45x1.9 smd paste-1.9 mask+0: 1(-7.6,1.3) 2(-6.8,1.3) 3(-6,1.3) 4(-5.2,1.3) 5(-4.4,1.3) 6(-3.6,1.3) 7(-2.8,1.3) 8(-2,1.3) 9(-1.2,1.3) 10(-0.4,1.3) 11(0.4,1.3) 12(1.2,1.3) 13(2,1.3) 14(2.8,1.3) 15(3.6,1.3) 16(4.4,1.3) 17(5.2,1.3) 18(6,1.3) 19(6.8,1.3) 20(7.6,1.3)
  rect 0.7x5 smd paste-5 mask+0: 21(8.5,-0.3) 22(-8.5,-0.3)
Fuse_1206_3216Metric#1 [mm]
  rrect20% 1.25x1.75 smd paste-1.75 mask+0: 1(1.4,0) 2(-1.4,0)
  silkscreen extent -0.6,-0.91 0.6,0.91
Fuse_1206_3216Metric#2 [mm]
  rrect20% 1.25x1.75 smd paste-1.75 mask+0: 1(-1.4,0) 2(1.4,0)
  silkscreen extent -0.6,-0.91 0.6,0.91
GRAMchip [mm]
  rect 0.4x1.3 smd paste-1.3 mask+0: 1(8.4,5.45) 2(7.6,5.45) 3(6.8,5.45) 4(6,5.45) 5(5.2,5.45) 6(4.4,5.45) 7(3.6,5.45) 8(2.8,5.45) 9(2,5.45) 10(1.2,5.45) 11(-1.25,5.45) 12(-2.05,5.45) 13(-2.85,5.45) 14(-3.65,5.45) 15(-4.45,5.45) 16(-5.25,5.45) 17(-6.05,5.45) 18(-6.85,5.45) 19(-7.65,5.45) 20(-8.45,5.45) 21(-8.45,-5.7) 22(-7.65,-5.7) 23(-6.85,-5.7) 24(-6.05,-5.7) 25(-5.2,-5.7) 26(-4.45,-5.7) 27(-3.65,-5.7) 28(-2.85,-5.7) 29(-2.05,-5.7) 30(-1.25,-5.7) 31(1.2,-5.75) 32(2,-5.75) 33(2.8,-5.75) 34(3.6,-5.75) 35(4.4,-5.75) 36(5.2,-5.75) 37(6,-5.75) 38(6.8,-5.75) 39(7.6,-5.75) 40(8.4,-5.75)
  silkscreen extent 7.84,3.54 8.56,4.26
IRDA [mm]
  rect 1x1.6 smd paste-1.6 mask+0: 1(0.65,-1.5) 2(-0.65,-1.5) 3(3.2,4.4) 4(-3.15,4.4)
  rect 1.1x1.1 hole 0.8 paste-2539.97 mask+0: 5(4.5,1.55) 6(1.95,1.55) 7(-1.9,1.55) 8(-4.45,1.55)
  rrect100% 2.2x3.3 hole 0.9 slot 2 at 90 deg paste-2539.97 mask+0: 9(8.55,1.55) 10(-8.5,1.55)
  Edge.Cuts circle w0.254: c7.25,-1.011 r0.461
  Edge.Cuts circle w0.254: c-7.25,-1 r0.461
L_0603_1608Metric#1 [mm]
  rrect25% 0.875x0.95 smd paste-0.95 mask+0: 1(-0.787,0) 2(0.788,0)
  silkscreen extent -0.16,-0.51 0.16,0.51
L_0603_1608Metric#2 [mm]
  rrect25% 0.875x0.95 smd paste-0.95 mask+0: 1(0.787,0) 2(-0.787,0)
  silkscreen extent -0.16,-0.51 0.16,0.51
L_0805_2012Metric#1 [mm]
  rrect25% 0.875x1.2 smd paste-1.2 mask+0: 1(1.062,0) 2(-1.063,0)
  silkscreen extent -0.4,-0.56 0.4,0.56
L_0805_2012Metric#2 [mm]
  rrect25% 0.875x1.2 smd paste-1.2 mask+0: 1(-1.062,0) 2(1.062,0)
  silkscreen extent -0.4,-0.56 0.4,0.56
L_1210_3225Metric [mm]
  rrect20% 1.25x2.65 smd paste-2.65 mask+0: 1(1.4,0) 2(-1.4,0)
  silkscreen extent -2.4,-1.7 2.4,1.7
LCD [mm]
  rect 1x1 hole 0.8 paste-2539.97 mask+0: 1(-11.9,0) 2(-10.1,0) 3(-8.3,0) 4(-6.5,0) 5(-4.7,0) 6(-2.9,0) 7(-1.1,0) 8(0.7,0) 9(2.5,0) 10(4.3,0) 11(6.1,0) 12(7.9,0) 13(9.7,0) 14(11.5,0)
LCD_connector [mm]
  rect 0.6x1.5 smd paste-1.5 mask+0: 1(-7.4,-1.25) 2(-6.9,1.55) 3(-6.4,-1.25) 4(-5.9,1.55) 5(-5.4,-1.25) 6(-4.9,1.55) 7(-4.4,-1.25) 8(-3.9,1.55) 9(-3.4,-1.25) 10(-2.9,1.55) 11(-2.4,-1.25) 12(-1.9,1.55) 13(-1.4,-1.25) 14(-0.9,1.55) 15(-0.4,-1.25) 16(0.15,1.55) 17(0.6,-1.25) 18(1.15,1.55) 19(1.65,-1.25) 20(2.15,1.55) 21(2.65,-1.25) 22(3.15,1.55) 23(3.65,-1.25) 24(4.15,1.55) 25(4.65,-1.25) 26(5.15,1.55) 27(5.65,-1.25) 28(6.15,1.55) 29(6.65,-1.25) 30(7.2,1.55)
  rect 0.8x1.7 smd paste-1.7 mask+0: 31(8.15,-1.35) 32(8.15,1.5) 33(-8.4,1.5) 34(-8.4,-1.3)
  silkscreen extent -8.23,-2.93 -7.67,-2.37
LidSwitch [mm]
  rect 1.6x0.8 smd paste-1.6 mask+0: 1(-2.575,0)
  rect 2x0.8 smd paste-2 mask+0: 2(2.8,-1.525) 3(2.8,1.475)
LQFP208 [mm]
  rect 1.5x0.4 smd paste-1.5 mask+0: 1(-14.9,12.75) 2(-14.9,12.25) 3(-14.9,11.75) 4(-14.9,11.25) 5(-14.9,10.75) 6(-14.9,10.25) 7(-14.9,9.75) 8(-14.9,9.25) 9(-14.9,8.75) 10(-14.9,8.25) 11(-14.9,7.75) 12(-14.9,7.25) 13(-14.9,6.75) 14(-14.9,6.25) 15(-14.9,5.75) 16(-14.9,5.25) 17(-14.9,4.75) 18(-14.9,4.25) 19(-14.9,3.75) 20(-14.9,3.25) 21(-14.9,2.75) 22(-14.9,2.25) 23(-14.9,1.75) 24(-14.9,1.25) 25(-14.9,0.75) 26(-14.9,0.25) 27(-14.9,-0.25) 28(-14.9,-0.75) 29(-14.9,-1.25) 30(-14.9,-1.75) 31(-14.9,-2.25) 32(-14.9,-2.75) 33(-14.9,-3.25) 34(-14.9,-3.75) 35(-14.9,-4.25) 36(-14.9,-4.75) 37(-14.9,-5.25) 38(-14.9,-5.75) 39(-14.9,-6.25) 40(-14.9,-6.75) 41(-14.9,-7.25) 42(-14.9,-7.75) 43(-14.9,-8.25) 44(-14.9,-8.75) 45(-14.9,-9.25) 46(-14.9,-9.75) 47(-14.9,-10.25) 48(-14.9,-10.75) 49(-14.9,-11.25) 50(-14.9,-11.75) 51(-14.9,-12.25) 52(-14.9,-12.75) 105(14.9,-12.75) 106(14.9,-12.25) 107(14.9,-11.75) 108(14.9,-11.25) 109(14.9,-10.75) 110(14.9,-10.25) 111(14.9,-9.75) 112(14.9,-9.25) 113(14.9,-8.75) 114(14.9,-8.25) 115(14.9,-7.75) 116(14.9,-7.25) 117(14.9,-6.75) 118(14.9,-6.25) 119(14.9,-5.75) 120(14.9,-5.25) 121(14.9,-4.75) 122(14.9,-4.25) 123(14.9,-3.75) 124(14.9,-3.25) 125(14.9,-2.75) 126(14.9,-2.25) 127(14.9,-1.75) 128(14.9,-1.25) 129(14.9,-0.75) 130(14.9,-0.25) 131(14.9,0.25) 132(14.9,0.75) 133(14.9,1.25) 134(14.9,1.75) 135(14.9,2.25) 136(14.9,2.75) 137(14.9,3.25) 138(14.9,3.75) 139(14.9,4.25) 140(14.9,4.75) 141(14.9,5.25) 142(14.9,5.75) 143(14.9,6.25) 144(14.9,6.75) 145(14.9,7.25) 146(14.9,7.75) 147(14.9,8.25) 148(14.9,8.75) 149(14.9,9.25) 150(14.9,9.75) 151(14.9,10.25) 152(14.9,10.75) 153(14.9,11.25) 154(14.9,11.75) 155(14.9,12.25) 156(14.9,12.75)
  rect 0.4x1.5 smd paste-1.5 mask+0: 53(-12.75,-14.9) 54(-12.25,-14.9) 55(-11.75,-14.9) 56(-11.25,-14.9) 57(-10.75,-14.9) 58(-10.25,-14.9) 59(-9.75,-14.9) 60(-9.25,-14.9) 61(-8.75,-14.9) 62(-8.25,-14.9) 63(-7.75,-14.9) 64(-7.25,-14.9) 65(-6.75,-14.9) 66(-6.25,-14.9) 67(-5.75,-14.9) 68(-5.25,-14.9) 69(-4.75,-14.9) 70(-4.25,-14.9) 71(-3.75,-14.9) 72(-3.25,-14.9) 73(-2.75,-14.9) 74(-2.25,-14.9) 75(-1.75,-14.9) 76(-1.25,-14.9) 77(-0.75,-14.9) 78(-0.25,-14.9) 79(0.25,-14.9) 80(0.75,-14.9) 81(1.25,-14.9) 82(1.75,-14.9) 83(2.25,-14.9) 84(2.75,-14.9) 85(3.25,-14.9) 86(3.75,-14.9) 87(4.25,-14.9) 88(4.75,-14.9) 89(5.25,-14.9) 90(5.75,-14.9) 91(6.25,-14.9) 92(6.75,-14.9) 93(7.25,-14.9) 94(7.75,-14.9) 95(8.25,-14.9) 96(8.75,-14.9) 97(9.25,-14.9) 98(9.75,-14.9) 99(10.25,-14.9) 100(10.75,-14.9) 101(11.25,-14.9) 102(11.75,-14.9) 103(12.25,-14.9) 104(12.75,-14.9) 157(12.75,14.9) 158(12.25,14.9) 159(11.75,14.9) 160(11.25,14.9) 161(10.75,14.9) 162(10.25,14.9) 163(9.75,14.9) 164(9.25,14.9) 165(8.75,14.9) 166(8.25,14.9) 167(7.75,14.9) 168(7.25,14.9) 169(6.75,14.9) 170(6.25,14.9) 171(5.75,14.9) 172(5.25,14.9) 173(4.75,14.9) 174(4.25,14.9) 175(3.75,14.9) 176(3.25,14.9) 177(2.75,14.9) 178(2.25,14.9) 179(1.75,14.9) 180(1.25,14.9) 181(0.75,14.9) 182(0.25,14.9) 183(-0.25,14.9) 184(-0.75,14.9) 185(-1.25,14.9) 186(-1.75,14.9) 187(-2.25,14.9) 188(-2.75,14.9) 189(-3.25,14.9) 190(-3.75,14.9) 191(-4.25,14.9) 192(-4.75,14.9) 193(-5.25,14.9) 194(-5.75,14.9) 195(-6.25,14.9) 196(-6.75,14.9) 197(-7.25,14.9) 198(-7.75,14.9) 199(-8.25,14.9) 200(-8.75,14.9) 201(-9.25,14.9) 202(-9.75,14.9) 203(-10.25,14.9) 204(-10.75,14.9) 205(-11.25,14.9) 206(-11.75,14.9) 207(-12.25,14.9) 208(-12.75,14.9)
  silkscreen extent -15.65,-14.12 14.12,14.12
Modem-Connector [mm]
  rect 0.65x2.286 smd paste-2.286 mask+0: 1(-7.55,2.15) 2(-6.3,2.15) 3(-5.05,2.15) 4(-3.8,2.15) 5(-2.55,2.15) 6(-1.3,2.15) 7(-0.05,2.15) 8(1.2,2.15) 9(2.5,2.15) 10(3.75,2.15) 11(5,2.15) 12(6.25,2.15) 13(7.5,2.15) 14(-7.6,-2.2) 15(-6.35,-2.2) 16(-5.1,-2.2) 17(-3.8,-2.2) 18(-2.55,-2.15) 19(-1.3,-2.2) 20(-0.05,-2.2) 21(1.2,-2.2) 22(2.45,-2.2) 23(3.7,-2.2) 24(4.95,-2.15) 25(6.2,-2.2) 26(7.45,-2.2)
  silkscreen extent -9.23,3.12 -8.67,3.68
PCMCIA [mm]
  rect 0.35x1.9 smd paste-1.9 mask+0: 1(-21.95,2) 2(-21.3,2) 3(-20.65,2) 4(-20,2) 5(-19.4,2) 6(-18.75,2) 7(-18.1,2) 8(-17.5,2) 9(-16.85,2) 10(-16.25,2) 11(-15.6,2) 12(-14.95,2) 13(-14.3,2) 14(-13.7,2) 15(-13.05,2) 16(-12.4,2) 17(-11.8,2) 18(-11.15,2) 19(-10.5,2) 20(-9.85,2) 21(-9.2,2) 22(-8.6,2) 23(-7.95,2) 24(-7.3,2) 25(-6.65,2) 26(-6.05,2) 27(-5.4,2) 28(-4.75,2) 29(-4.1,2) 30(-3.5,2) 31(-2.85,2) 32(-2.25,2) 33(-1.6,2) 34(-0.95,2) 35(-0.3,2) 36(0.35,2) 37(0.95,2) 38(1.6,2) 39(2.25,2) 40(2.85,2) 41(3.5,2) 42(4.15,2) 43(4.8,2) 44(5.4,2) 45(6.05,2) 46(6.65,2) 47(7.3,2) 48(7.95,2) 49(8.55,2) 50(9.2,2) 51(9.85,2) 52(10.5,2) 53(11.1,2) 54(11.75,2) 55(12.4,2) 56(13,2) 57(13.65,2) 58(14.3,2) 59(14.9,2) 60(15.55,2) 61(16.15,2) 62(16.8,2) 63(17.45,2) 64(18.1,2) 65(18.7,2) 66(19.35,2) 67(20,2) 68(20.6,2) 69(21.25,2) 70(21.85,2) 71(-21.95,-2.25) 72(-21.3,-2.25) 73(-20.65,-2.25) 74(-20.05,-2.25) 75(-19.4,-2.25) 76(-18.75,-2.25) 77(-18.15,-2.25) 78(-17.5,-2.25) 79(-16.85,-2.25) 80(-16.25,-2.25) 81(-15.6,-2.25) 82(-14.95,-2.25) 83(-14.35,-2.25) 84(-13.7,-2.25) 85(-13.05,-2.25) 86(-12.4,-2.25) 87(-11.75,-2.25) 88(-11.15,-2.25) 89(-10.5,-2.25) 90(-9.85,-2.25) 91(-9.2,-2.25) 92(-8.6,-2.25) 93(-7.95,-2.25) 94(-7.3,-2.25) 95(-6.65,-2.25) 96(-6.05,-2.25) 97(-5.4,-2.25) 98(-4.75,-2.25) 99(-4.15,-2.25) 100(-3.5,-2.25) 101(-2.85,-2.25) 102(-2.2,-2.25) 103(-1.6,-2.25) 104(-0.95,-2.25) 105(-0.3,-2.25) 106(0.35,-2.25) 107(0.95,-2.25) 108(1.6,-2.25) 109(2.2,-2.25) 110(2.85,-2.25) 111(3.5,-2.25) 112(4.15,-2.25) 113(4.75,-2.25) 114(5.4,-2.25) 115(6.05,-2.25) 116(6.7,-2.25) 117(7.3,-2.25) 118(7.95,-2.25) 119(8.55,-2.25) 120(9.2,-2.25) 121(9.85,-2.25) 122(10.45,-2.25) 123(11.1,-2.25) 124(11.75,-2.25) 125(12.4,-2.25) 126(13,-2.25) 127(13.65,-2.25) 128(14.3,-2.25) 129(14.9,-2.25) 130(15.55,-2.25) 131(16.15,-2.25) 132(16.8,-2.25) 133(17.45,-2.25) 134(18.05,-2.25) 135(18.7,-2.25) 136(19.35,-2.25) 137(19.95,-2.25) 138(20.6,-2.25) 139(21.25,-2.25) 140(21.85,-2.25)
  silkscreen extent -24.03,1.87 -22.87,3.03
PGA168 [mil]
  round 60 hole 30 paste-99999 mask+0: A1(1700,-100) A2(1700,-200) A3(1700,-300) A4(1700,-400) A5(1700,-500) A6(1700,-600) A7(1700,-700) A8(1700,-800) A9(1700,-900) A10(1700,-1000) A11(1700,-1100) A12(1700,-1200) A13(1700,-1300) A14(1700,-1400) A15(1700,-1500) A16(1700,-1600) A17(1700,-1700) B1(1600,-100) B2(1600,-200) B3(1600,-300) B4(1600,-400) B5(1600,-500) B6(1600,-600) B7(1600,-700) B8(1600,-800) B9(1600,-900) B10(1600,-1000) B11(1600,-1100) B12(1600,-1200) B13(1600,-1300) B14(1600,-1400) B15(1600,-1500) B16(1600,-1600) B17(1600,-1700) C1(1500,-100) C2(1500,-200) C3(1500,-300) C4(1500,-400) C5(1500,-500) C6(1500,-600) C7(1500,-700) C8(1500,-800) C9(1500,-900) C10(1500,-1000) C11(1500,-1100) C12(1500,-1200) C13(1500,-1300) C14(1500,-1400) C15(1500,-1500) C16(1500,-1600) C17(1500,-1700) D1(1400,-100) D2(1400,-200) D3(1400,-300) D15(1400,-1500) D16(1400,-1600) D17(1400,-1700) E1(1300,-100) E2(1300,-200) E3(1300,-300) E15(1300,-1500) E16(1300,-1600) E17(1300,-1700) F1(1200,-100) F2(1200,-200) F3(1200,-300) F15(1200,-1500) F16(1200,-1600) F17(1200,-1700) G1(1100,-100) G2(1100,-200) G3(1100,-300) G15(1100,-1500) G16(1100,-1600) G17(1100,-1700) H1(1000,-100) H2(1000,-200) H3(1000,-300) H15(1000,-1500) H16(1000,-1600) H17(1000,-1700) J1(900,-100) J2(900,-200) J3(900,-300) J15(900,-1500) J16(900,-1600) J17(900,-1700) K1(800,-100) K2(800,-200) K3(800,-300) K15(800,-1500) K16(800,-1600) K17(800,-1700) L1(700,-100) L2(700,-200) L3(700,-300) L15(700,-1500) L16(700,-1600) L17(700,-1700) M1(600,-100) M2(600,-200) M3(600,-300) M15(600,-1500) M16(600,-1600) M17(600,-1700) N1(500,-100) N2(500,-200) N3(500,-300) N15(500,-1500) N16(500,-1600) N17(500,-1700) P1(400,-100) P2(400,-200) P3(400,-300) P15(400,-1500) P16(400,-1600) P17(400,-1700) Q1(300,-100) Q2(300,-200) Q3(300,-300) Q4(300,-400) Q5(300,-500) Q6(300,-600) Q7(300,-700) Q8(300,-800) Q9(300,-900) Q10(300,-1000) Q11(300,-1100) Q12(300,-1200) Q13(300,-1300) Q14(300,-1400) Q15(300,-1500) Q16(300,-1600) Q17(300,-1700) R1(200,-100) R2(200,-200) R3(200,-300) R4(200,-400) R5(200,-500) R6(200,-600) R7(200,-700) R8(200,-800) R9(200,-900) R10(200,-1000) R11(200,-1100) R12(200,-1200) R13(200,-1300) R14(200,-1400) R15(200,-1500) R16(200,-1600) R17(200,-1700) S1(100,-100) S2(100,-200) S3(100,-300) S4(100,-400) S5(100,-500) S6(100,-600) S7(100,-700) S8(100,-800) S9(100,-900) S10(100,-1000) S11(100,-1100) S12(100,-1200) S13(100,-1300) S14(100,-1400) S15(100,-1500) S16(100,-1600) S17(100,-1700)
  silkscreen extent 16,-1783 1786,-17
Pluto [mm]
  rect 0.45x1.6 smd paste-1.6 mask+0: 1(6.1,7.15) 25(-6.1,7.15) 51(-6.1,-8.1) 75(6.1,-8.1)
  rect 0.3x1.6 smd paste-1.6 mask+0: 2(5.5,7.15) 3(5,7.15) 4(4.5,7.15) 5(4,7.15) 6(3.5,7.15) 7(3,7.15) 8(2.5,7.15) 9(2,7.15) 10(1.5,7.15) 11(1,7.15) 12(0.5,7.15) 13(0,7.15) 14(-0.5,7.15) 15(-1,7.15) 16(-1.5,7.15) 17(-2,7.15) 18(-2.5,7.15) 19(-3,7.15) 20(-3.5,7.15) 21(-4,7.15) 22(-4.5,7.15) 23(-5,7.15) 24(-5.5,7.15) 52(-5.5,-8.1) 53(-5,-8.1) 54(-4.5,-8.1) 55(-4,-8.1) 56(-3.5,-8.1) 57(-3,-8.1) 58(-2.5,-8.1) 59(-2,-8.1) 60(-1.5,-8.1) 61(-1,-8.1) 62(-0.5,-8.1) 63(0,-8.1) 64(0.5,-8.1) 65(1,-8.1) 66(1.5,-8.1) 67(2,-8.1) 68(2.5,-8.1) 69(3,-8.1) 70(3.5,-8.1) 71(4,-8.1) 72(4.5,-8.1) 73(5,-8.1) 74(5.5,-8.1)
  rect 1.6x0.45 smd paste-1.6 mask+0: 26(-7.55,5.6) 50(-7.55,-6.6) 76(7.6,-6.6) 100(7.6,5.6)
  rect 1.6x0.3 smd paste-1.6 mask+0: 27(-7.55,5) 28(-7.55,4.5) 29(-7.55,4) 30(-7.55,3.5) 31(-7.55,3) 32(-7.55,2.5) 33(-7.55,2) 34(-7.55,1.5) 35(-7.55,1) 36(-7.55,0.5) 37(-7.55,0) 38(-7.55,-0.5) 39(-7.55,-1) 40(-7.55,-1.5) 41(-7.55,-2) 42(-7.55,-2.5) 43(-7.55,-3) 44(-7.55,-3.5) 45(-7.55,-4) 46(-7.55,-4.5) 47(-7.55,-5) 48(-7.55,-5.5) 49(-7.55,-6) 77(7.6,-6) 78(7.6,-5.5) 79(7.6,-5) 80(7.6,-4.5) 81(7.6,-4) 82(7.6,-3.5) 83(7.6,-3) 84(7.6,-2.5) 85(7.6,-2) 86(7.6,-1.5) 87(7.6,-1) 88(7.6,-0.5) 89(7.6,0) 90(7.6,0.5) 91(7.6,1) 92(7.6,1.5) 93(7.6,2) 94(7.6,2.5) 95(7.6,3) 96(7.6,3.5) 97(7.6,4) 98(7.6,4.5) 99(7.6,5)
  silkscreen extent 5.61,5.11 6.19,5.69
PS2 [mm]
  rect 0.6x2.2 smd paste-2.2 mask+0: 1(3.6,-2.1) 4(0.55,-2.1) 5(-0.45,-2.1) 8(-3.45,-2.1)
  rect 0.6x2 smd paste-2.2 mask+0: 2(2.6,-2.1) 3(1.6,-2.1) 6(-1.45,-2.1) 7(-2.45,-2.1)
  Edge.Cuts lines w0: 5.75,3.4 ccw(c5.3,3.4) 4.85,3.4 4.85,1.7 ccw(c5.3,1.7) 5.75,1.7 5.75,3.4
  Edge.Cuts lines w0.254: 5.75,3.4 ccw(c5.3,3.4) 4.85,3.4 4.85,1.7 ccw(c5.3,1.7) 5.75,1.7 5.75,3.4 ; 2.9,0.2 cw(c2.9,-0.3) 2.9,-0.8 1.8,-0.8 cw(c1.8,-0.3) 1.8,0.2 2.9,0.2 ; -1.7,0.2 cw(c-1.7,-0.3) -1.7,-0.8 -2.8,-0.8 cw(c-2.8,-0.3) -2.8,0.2 -1.7,0.2 ; -4.7,3.4 ccw(c-5.15,3.4) -5.6,3.4 -5.6,1.7 ccw(c-5.15,1.7) -4.7,1.7 -4.7,3.4
PSU_Connector [mm]
  rect 0.5x2.5 smd paste-2.5 mask+0: 1(-7.45,-2.4) 2(-6.65,-2.4) 3(-5.85,-2.4) 4(-5.05,-2.4) 5(-4.25,-2.4) 6(-3.45,-2.4) 7(-2.6,-2.4) 8(-1.85,-2.4) 9(-1,-2.4) 10(-0.2,-2.4) 11(0.55,-2.4) 12(1.4,-2.4) 13(2.2,-2.4) 14(3,-2.4) 15(3.8,-2.4) 16(4.6,-2.4) 17(5.4,-2.4) 18(6.2,-2.4) 19(7,-2.4) 20(7.8,-2.4) 21(-7.4,2.4) 22(-6.6,2.4) 23(-5.8,2.4) 24(-5,2.4) 25(-4.2,2.4) 26(-3.4,2.4) 27(-2.6,2.4) 28(-1.8,2.4) 29(-1,2.4) 30(-0.2,2.4) 31(0.6,2.4) 32(1.4,2.4) 33(2.2,2.4) 34(3,2.4) 35(3.8,2.4) 36(4.6,2.4) 37(5.4,2.4) 38(6.2,2.4) 39(7,2.4) 40(7.85,2.4)
  silkscreen extent -8.48,-2.73 -7.92,-2.17
QFN64 [mm]
  rect 1.9x0.45 smd paste-1.9 mask+0: 1(6,-3.6) 16(6,4.1) 33(-5.5,4.1) 48(-5.5,-3.6)
  rect 1.9x0.3 smd paste-1.9 mask+0: 2(6,-3) 3(6,-2.5) 4(6,-2) 5(6,-1.5) 6(6,-1) 7(6,-0.5) 8(6,0) 9(6,0.5) 10(6,1) 11(6,1.5) 12(6,2) 13(6,2.5) 14(6,3) 15(6,3.5) 34(-5.5,3.5) 35(-5.5,3) 36(-5.5,2.5) 37(-5.5,2) 38(-5.5,1.5) 39(-5.5,1) 40(-5.5,0.5) 41(-5.5,0) 42(-5.5,-0.5) 43(-5.5,-1) 44(-5.5,-1.5) 45(-5.5,-2) 46(-5.5,-2.5) 47(-5.5,-3)
  rect 0.45x1.9 smd paste-1.9 mask+0: 17(4.1,6) 32(-3.6,6) 49(-3.6,-5.5) 64(4.1,-5.5)
  rect 0.3x1.9 smd paste-1.9 mask+0: 18(3.5,6) 19(3,6) 20(2.5,6) 21(2,6) 22(1.5,6) 23(1,6) 24(0.5,6) 25(0,6) 26(-0.5,6) 27(-1,6) 28(-1.5,6) 29(-2,6) 30(-2.5,6) 31(-3,6) 50(-3,-5.5) 51(-2.5,-5.5) 52(-2,-5.5) 53(-1.5,-5.5) 54(-1,-5.5) 55(-0.5,-5.5) 56(0,-5.5) 57(0.5,-5.5) 58(1,-5.5) 59(1.5,-5.5) 60(2,-5.5) 61(2.5,-5.5) 62(3,-5.5) 63(3.5,-5.5)
  silkscreen extent -4.3,-4.3 4.8,4.8
QFN-52 [mm]
  rect 0.5x2.2 smd paste-2.2 mask+0: 1(-3.6,-6.25) 13(4.4,-6.25) 27(4.4,6.2) 39(-3.6,6.2)
  rect 0.35x2.2 smd paste-2.2 mask+0: 2(-2.85,-6.25) 3(-2.2,-6.25) 4(-1.55,-6.25) 5(-0.9,-6.25) 6(-0.25,-6.25) 7(0.4,-6.25) 8(1.05,-6.25) 9(1.7,-6.25) 10(2.35,-6.25) 11(3,-6.25) 12(3.65,-6.25) 28(3.65,6.2) 29(3,6.2) 30(2.35,6.2) 31(1.7,6.2) 32(1.05,6.2) 33(0.4,6.2) 34(-0.25,6.2) 35(-0.9,6.2) 36(-1.55,6.2) 37(-2.2,6.2) 38(-2.85,6.2)
  rect 2.2x0.5 smd paste-2.2 mask+0: 14(6.6,-4) 26(6.65,3.95) 40(-5.8,3.95) 52(-5.8,-4)
  rect 2.2x0.35 smd paste-2.2 mask+0: 15(6.65,-3.3) 16(6.65,-2.65) 17(6.65,-2) 18(6.65,-1.35) 19(6.65,-0.7) 20(6.65,-0.05) 21(6.65,0.6) 22(6.65,1.25) 23(6.65,1.9) 24(6.65,2.55) 25(6.65,3.25) 41(-5.8,3.25) 42(-5.8,2.6) 43(-5.8,1.95) 44(-5.8,1.3) 45(-5.8,0.65) 46(-5.8,0) 47(-5.8,-0.65) 48(-5.8,-1.3) 49(-5.8,-2) 50(-5.8,-2.6) 51(-5.8,-3.25)
  silkscreen extent -3.92,-4.32 -3.28,-3.68